# Altium PCB PCB2.PcbDoc
Units mil, origin at the board's own origin, x right, y up, seen from the top; angles counter-clockwise.
Board outline 6000 x 4000 mil, 2 copper layers (Top Layer, Bottom Layer); 2 components, 9 nets, 52 pads, 0 vias.
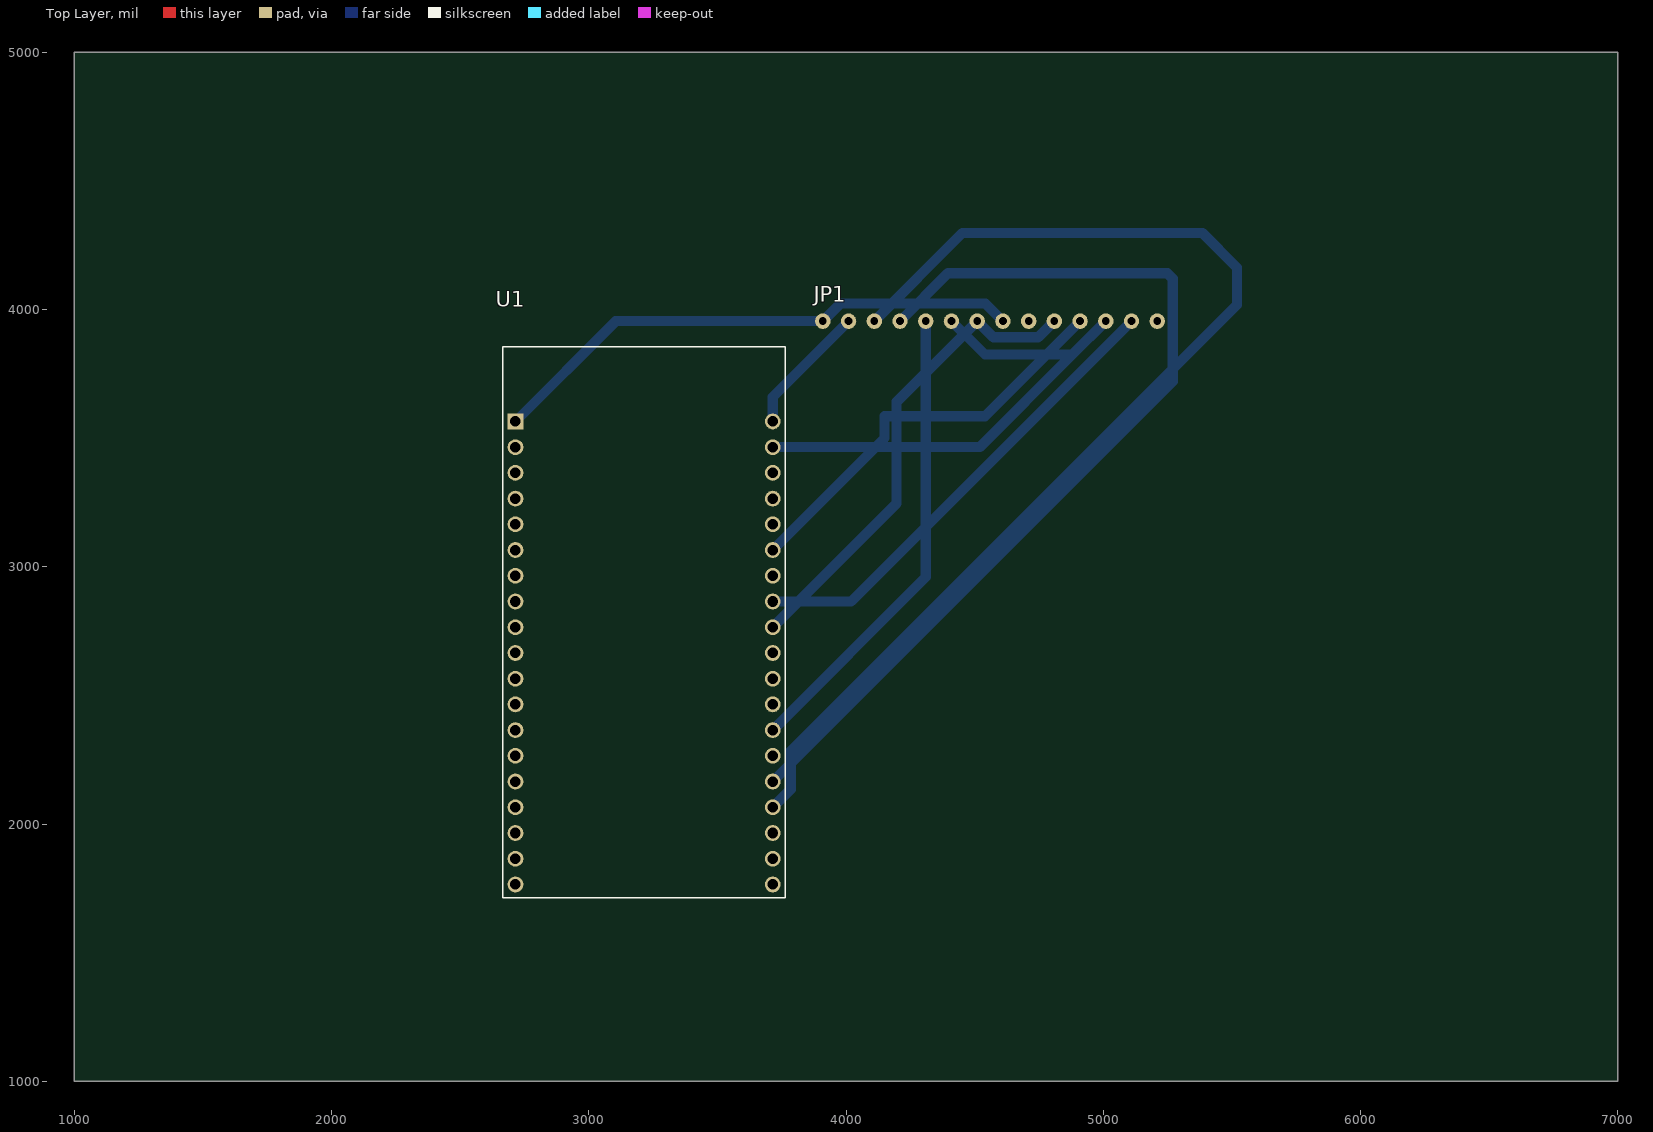
[diagram p0: Top Layer view]
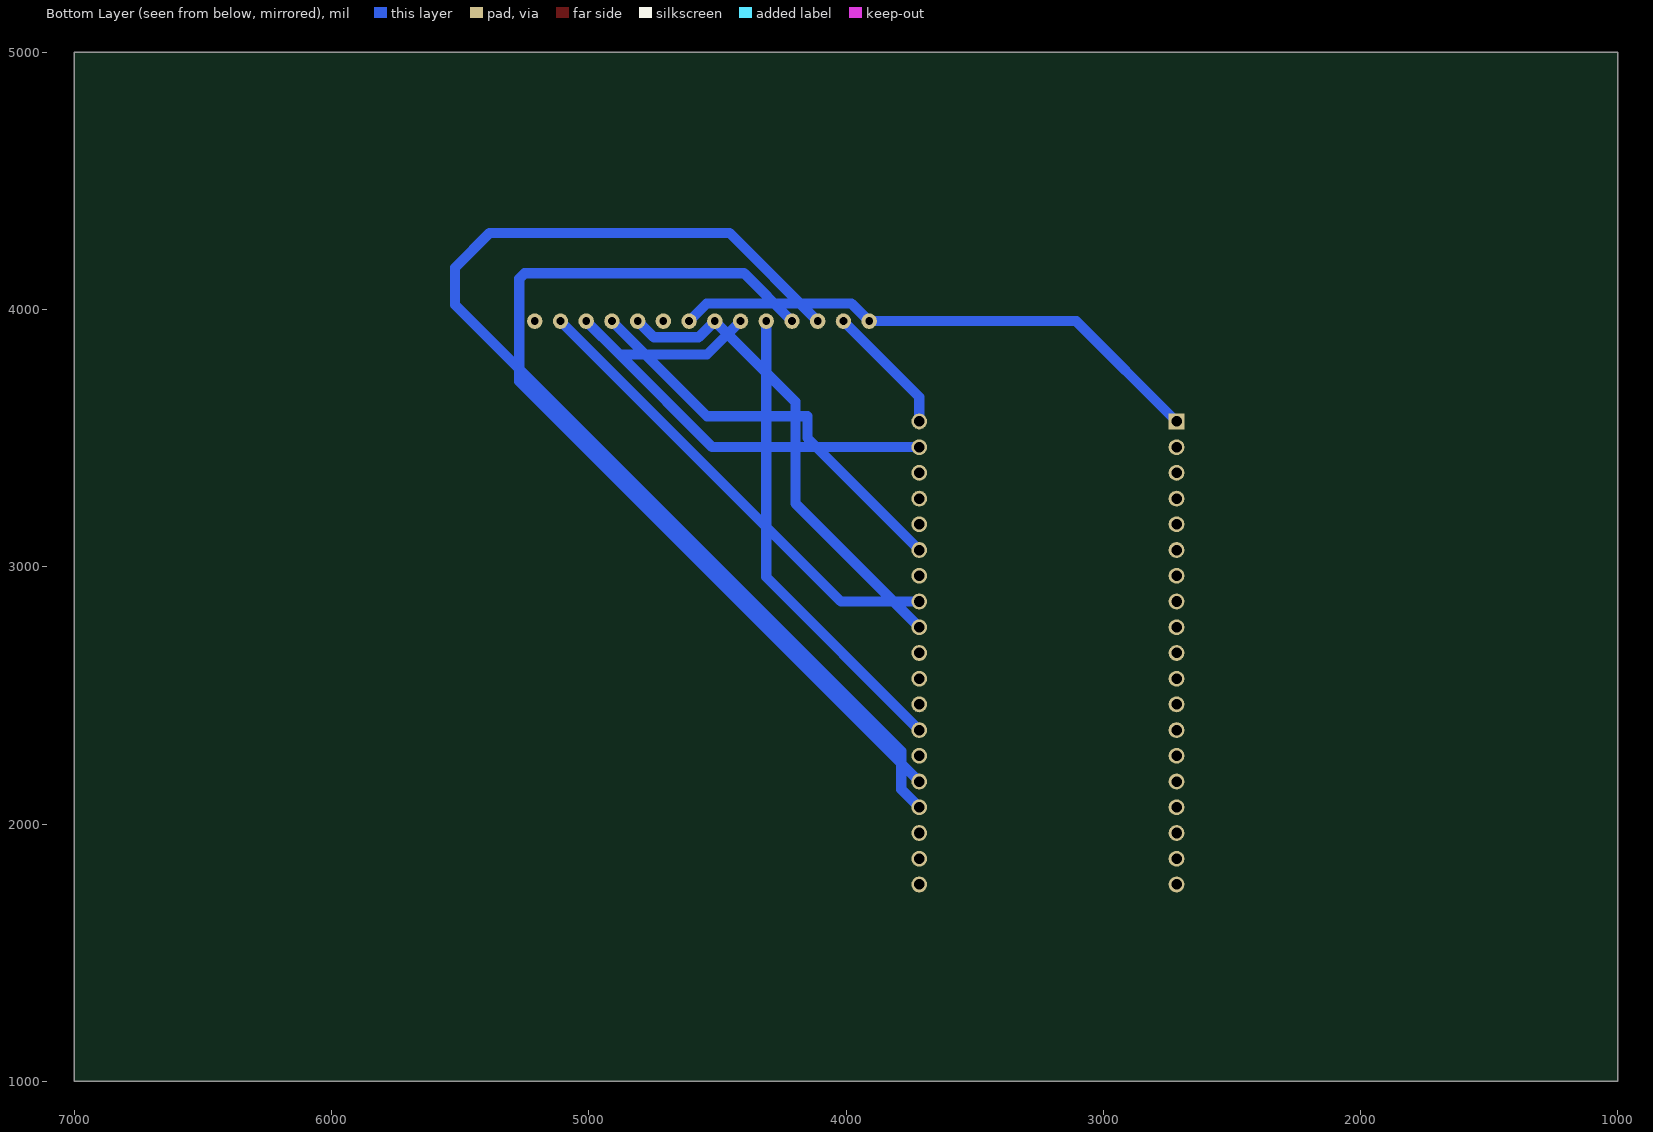
[diagram p1: Bottom Layer view, seen from below]

## Layer stack, top to bottom
Top Solder: solder mask 0.4, Solder Resist, Dk 3.5
Top Layer: signal copper 1.4
Dielectric 1: dielectric 12.6, FR-4, Dk 4.8
Bottom Layer: signal copper 1.4
Bottom Solder: solder mask 0.4, Solder Resist, Dk 3.5

## Board outline
1000,1000 7000,1000 7000,5000 1000,5000

## Design rules (kind name [scope] priority, off if disabled: settings)
Clearance [All] p1: gap=10 ignorepadtopadclearanceinfootprint=FALSE except(0: Arc-Hole Track-Hole SMDPad-Hole THPad-Hole Via-Hole Fill-Hole Poly-Hole Region-Hole Text-Hole)
PolygonConnect [All] p1: connectstyle=Relief reliefconductorwidth=10 reliefentries=4 polygonreliefangle="90 Angle" airgapwidth=10
RoutingLayers [All] p1: top layer_v5=FALSE bottom layer_v5=TRUE
RoutingVias [All] p1: holewidth=28 width=50 viastyle="Through Hole" minholewidth=28 minwidth=50 maxholewidth=28 maxwidth=50
SolderMaskExpansion [All] p1: expansion=4
Width [All] p1: maxlimit=10 minlimit=10 preferedwidth=39.37
29 further rules are at their usual default settings.

## Components (designator, comment, footprint, x,y, rotation, side; value= is the part's Value field where it differs from the comment)
JP1 "JP" "Jumper 14x1 - duplicate" 4690,4135 r90 top
U1 "ESP32-DEVKITC-32D" MODULE_ESP32-DEVKITC-32D 3215,2787.05 r0 top

## Footprints (in the part's own frame and the unit in brackets; to place one, negate y for a bottom-side part, rotate by r counter-clockwise, add the part's x,y. Pads: shape width x height; smd on the part's side, far side on the other; paste and mask are expansions set on the pad)
"Jumper 14x1 - duplicate" [mil]
  round 60 hole 30: 1(-180,780) 2(-180,680) 3(-180,580) 4(-180,480) 5(-180,380) 6(-180,280) 7(-180,180) 8(-180,80) 9(-180,-20) 10(-180,-120) 11(-180,-220) 12(-180,-320) 13(-180,-420) 14(-180,-520)
MODULE_ESP32-DEVKITC-32D [mm]
  rect 1.56x1.56 hole 1.04: 1(-12.7,19.76)
  round 1.56 hole 1.04: 2(-12.7,17.22) 3(-12.7,14.68) 4(-12.7,12.14) 5(-12.7,9.6) 6(-12.7,7.06) 7(-12.7,4.52) 8(-12.7,1.98) 9(-12.7,-0.56) 10(-12.7,-3.1) 11(-12.7,-5.64) 12(-12.7,-8.18) 13(-12.7,-10.72) 14(-12.7,-13.26) 15(-12.7,-15.8) 16(-12.7,-18.34) 17(-12.7,-20.88) 18(-12.7,-23.42) 19(-12.7,-25.96) 20(12.7,19.76) 21(12.7,17.22) 22(12.7,14.68) 23(12.7,12.14) 24(12.7,9.6) 25(12.7,7.06) 26(12.7,4.52) 27(12.7,1.98) 28(12.7,-0.56) 29(12.7,-3.1) 30(12.7,-5.64) 31(12.7,-8.18) 32(12.7,-10.72) 33(12.7,-13.26) 34(12.7,-15.8) 35(12.7,-18.34) 36(12.7,-20.88) 37(12.7,-23.42) 38(12.7,-25.96)
  silkscreen extent -13.95,-27.25 13.95,27.15, body extent -13.97,-24.8 13.97,30.3, height 3.25

## Part data
JP1: library part "Jumper 14x1"
U1: "EVAL BOARD FOR ESP-WROOM-32", Package=None, Availability=Warning, Check_prices=https://www.snapeda.com/parts/ESP32-DEVKITC-32D/Espressif%20Systems/view-part/2777395/?ref=eda, MF="Espressif Systems", MP=ESP32-DEVKITC-32D, Price=None, Purchase-URL=https://pricing.snapeda.com/search/part/ESP32-DEVKITC-32D/?ref=eda, SnapEDA_Link=https://www.snapeda.com/parts/ESP32-DEVKITC-32D/Espressif%20Systems/view-part/2777395/?ref=snap

## Nets (pads, with @x,y where several pads share a name; then routed paths per layer and width w, separated by ;. In a path a pad name is that pad's centre, name@x,y a point inside that pad or via, vN(x,y) a via of type N, cw(c..) or ccw(c..) an arc to the next point about the centre after c; other vN are vias at no path point)
NetJP1_1: JP1.1 JP1.8 U1.1 | length 2112.9
  Bottom Layer w39.37: U1.1 3105,3955 JP1.1 3978,4023 4542,4023 JP1.8
NetJP1_2: JP1.2 U1.20 | length 512.2
  Bottom Layer w39.37: U1.20 3715,3660 JP1.2
NetJP1_3: JP1.3 U1.35 | length 4453.6
  Bottom Layer w39.37: U1.35 3785,2135 3785,2283 5520,4018 5520,4163 5385,4298 4453,4298 JP1.3
NetJP1_4: JP1.4 U1.34 | length 3744.8
  Bottom Layer w39.37: U1.34 5270,3720 5270,4120 5249,4141 4396,4141 JP1.4
NetJP1_5: JP1.5 U1.32 | length 1836.5
  Bottom Layer w39.37: U1.32 4310,2960 JP1.5
NetJP1_6: JP1.6 JP1.12 U1.21 | length 2021.8
  Bottom Layer w39.37: U1.21 4520,3465 4880,3825 ; JP1.6 4540,3825 4880,3825 ; JP1.12 4880,3825
NetJP1_7: JP1.7 JP1.10 U1.28 | length 1871.5
  Bottom Layer w39.37: U1.28 4197,3247 4197,3642 JP1.7 4573,3892 4747,3892 JP1.10
NetJP1_11: JP1.11 U1.25 | length 1613.4
  Bottom Layer w39.37: U1.25 4150,3500 4150,3585 4540,3585 JP1.11
NetJP1_13: JP1.13 U1.27 | length 1846.5
  Bottom Layer w39.37: U1.27 4020,2865 JP1.13
pads on no net: JP1.9 JP1.14 U1.2 U1.3 U1.4 U1.5 U1.6 U1.7 U1.8 U1.9 U1.10 U1.11 U1.12 U1.13 U1.14 U1.15 U1.16 U1.17 U1.18 U1.19 U1.22 U1.23 U1.24 U1.26 U1.29 U1.30 U1.31 U1.33 U1.36 U1.37 U1.38